# Altium PCB {TEX137}_F2837x_controlCARD_R1.3_PCB_PADS.PcbDoc (part 6 of 6)
Units mil, origin at the board's own origin, x right, y up, seen from the top; angles counter-clockwise.
Board outline 4163.98 x 2011.3 mil, 10 copper layers (Primary Side, Inner Layer 2, Inner Layer 3, Inner Layer 4, Inner Layer 5, Inner Layer 6, Inner Layer 7, Inner Layer 8, Inner Layer 9, Secondary Side), stack 103.5 mil thick; 292 components, 317 nets, 1400 pads, 1032 vias.
Unrouted connection lines stored in the file: 106.
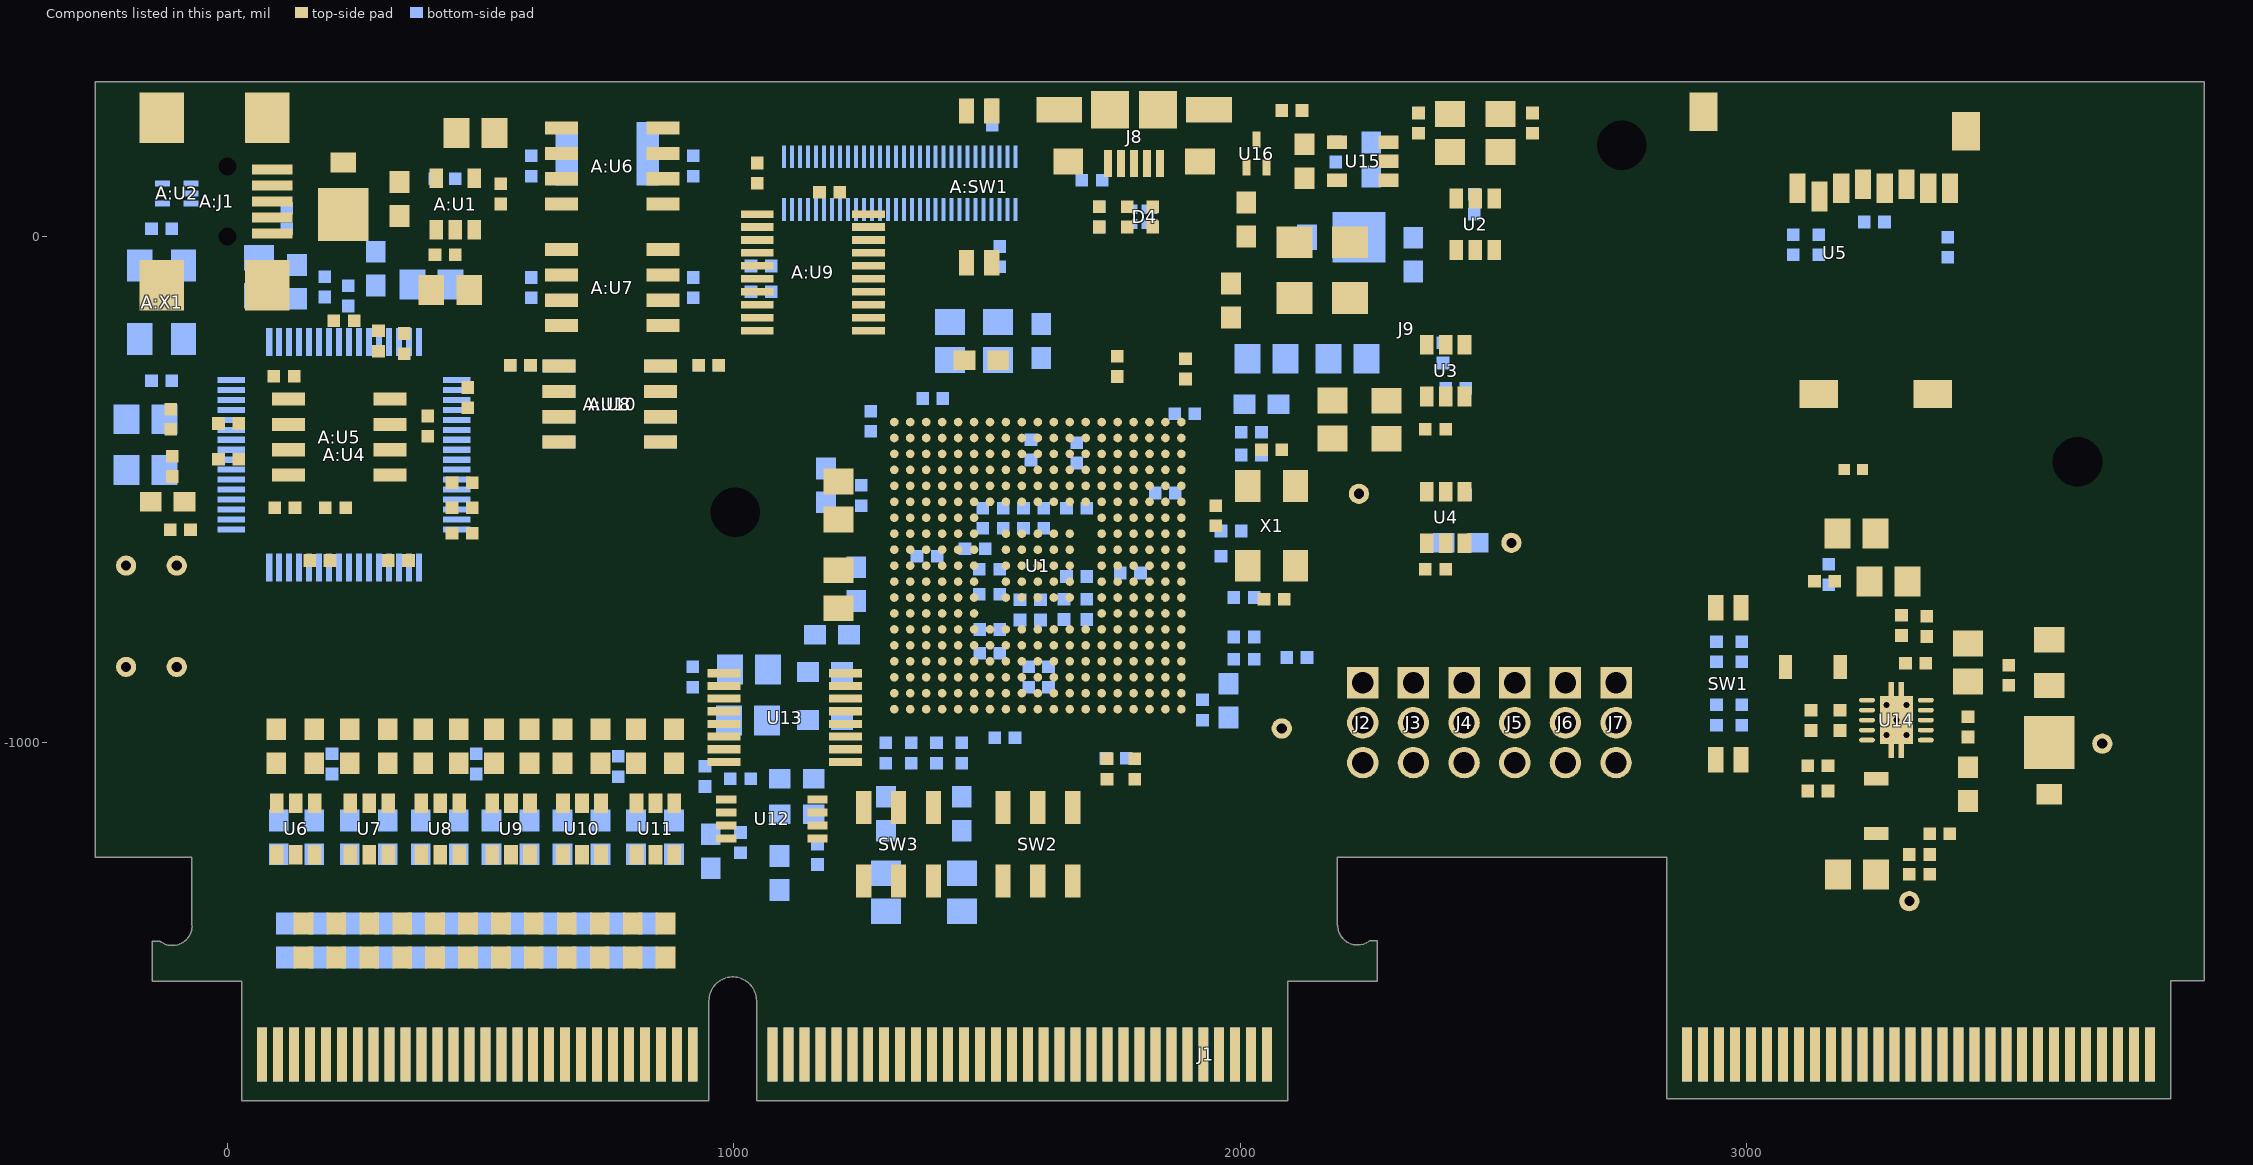
[diagram p14: the components of this part, seen from the top]

## Keep-outs
Keep-Out Layer:
  lines w10: -132.44,-1392.1 -148.44,-1392.1 -148.44,-1470.1 28.56,-1470.1 28.56,-1706.1 950.67,-1706.1 950.67,-1509.1 cw(c997.67,-1509.1) 1044.67,-1509.1 1044.67,-1706.1 2093.56,-1706.1 2093.56,-1470.1 2270.56,-1470.1 2270.56,-1391.1 2254.56,-1391.1 ; -132.42,-1392.12 ccw(c-108.89,-1361.01) -69.94,-1359.11 -70.44,-1359.1 -70.44,-1226.1 -261.41,-1226.1 -261.42,305.19 3902.56,305.2 3902.56,-1470 3837.15,-1470 3837.15,-1702.1 2841.87,-1702.1 2841.87,-1226.1 2191.56,-1226.1 2191.56,-1262.51 ; 2254.59,-1391.08 cw(c2231.06,-1359.98) 2192.06,-1360.11 2191.56,-1360.1 2191.56,-1262.51 ; 2191.56,-1262.51 2191.56,-1262.51

## Other copper
Primary Side:
  region net VDD_3V3: 3085,-855 3045,-855 3045,-509.2 3190,-509.2 3190,-615 3145,-615 3145,-805 3085,-805 3085,-855
  region net USB_5V0: 3625,-785 3565,-785 3565,-670 3625,-670 3625,-785
  region net HSEC_5V0: 3545,-1085 3670,-1085 3670,-1180 3545,-1180 3545,-1085
  region net VDD_MCU_3V3: 1521,-238.02 1630.5,-238.02 1630.5,-287.02 1521,-287.02 1521,-238.02
  region net EMU_5V0: 245,95 305,95 305,10 245,10 245,95
  region net $$$4984: 3245,-915 3215,-915 3215,-880 3165,-880 3165,-825 3245,-825 3245,-915
  region net $$$6167: 3226.9,-991.5 3251.1,-991.5 3251.1,-1075.9 3226.9,-1075.9 3226.9,-991.5
  text "1" at 5106.07,-6247.49 h75
  text "Primary Side" at 6491.14,-6261.77 h75
Inner Layer 3:
  text "8" at 5090.01,-6247.49 h75
  text "Internal Signal 4" at 6409.19,-6261.77 h75
Inner Layer 4:
  text "4" at 5088.22,-6247.49 h75
  text "Internal Signal 2" at 6410.98,-6261.77 h75
Inner Layer 7:
  text "7" at 5090.01,-6247.49 h75
  text "Internal Signal 3" at 6410.98,-6261.77 h75
Inner Layer 8:
  text "3" at 5090.01,-6247.49 h75
  text "Internal Signal 1" at 6427.05,-6261.77 h75
Secondary Side:
  region net HSEC_5V0: 3670,-1085 3615,-1085 3615,-1180 3670,-1180 3670,-1085
  region net USB_5V0: 3620,-775 3570,-775 3570,-675 3620,-675 3620,-775
  region net VDD_3V3: 1417,-141.54 1366.5,-141.54 1366.5,-196.9 1417,-196.9 1417,-141.54
  region net VDD_MCU_3V3: 1521,-234.02 1630.9,-234.02 1630.9,-287.02 1521,-287.02 1521,-234.02
  text "TEX137" at -222.49,-1158.52 h30 r270
  text "F2837x controlCARD R1.3" at 3811,-1218.9 h30 r270
  text "Pb" at 3805,-1355.77 h25 r270
  text "10" at 5062.51,-6247.49 h75
  text "Secondary Side" at 6422.41,-6261.77 h75
Inner Layer 2 (plane layer: these items are gaps in the copper):
  region: 700,318.9 800,318.9 800,-781 781,-800 -275.5,-800 -275.5,-700 675,-700 700,-675 700,318.9
  lines w10: 721.85,-752.63 744.35,-775.13 ; 745,-775 1475,-775 1475,-900 1505,-900 1505,-935 1475,-935 1475,-1407.48 1425,-1407.48
  lines w50: -132.44,-1392.1 -148.44,-1392.1 -148.44,-1470.1 28.56,-1470.1 28.56,-1706.1 950.67,-1706.1 950.67,-1509.1 cw(c997.67,-1509.1) 1044.67,-1509.1 1044.67,-1706.1 2093.56,-1706.1 2093.56,-1470.1 2270.56,-1470.1 2270.56,-1391.1 2254.56,-1391.1 ; -132.42,-1392.12 ccw(c-108.89,-1361.01) -69.94,-1359.11 -70.44,-1359.1 -70.44,-1226.1 -263.94,-1226.1 -263.93,305.19 3902.56,305.19 3902.56,-1470 3837.15,-1470 3837.15,-1702.1 2841.87,-1702.1 2841.87,-1226.1 2191.56,-1226.1 2191.56,-1360.1 2192.06,-1360.1 ccw(c2231.06,-1359.98) 2254.59,-1391.08
  text "2" at 5090.01,-6247.49 h75
  text "Internal Plane 1" at 6442.76,-6247.49 h75
Inner Layer 5 (plane layer: these items are gaps in the copper):
  region: 57 vertices and 4 holes, not listed, extent -261.42,-1706.1 3902.56,305.2
  region: 2120,-1060 2195,-1060 2195,-1185 2120,-1185 2120,-1060
  lines w10: 925,-1506.48 925,-1615 90,-1615 90,-1435 -35,-1435 -35,-1195 -239,-1195 -239,-800 779,-800 779,-780 1470,-780 1470,-905 1500,-905 1500,-930 1470,-930 1470,-1402.48 1420,-1402.48 1420,-1412.48 1480,-1412.48 1480,-940 1510,-940 1510,-895 1480,-895 1480,-770 800,-770 800,279.52 3876,279.52 3876,-1443.48 3811,-1443.48 3811,-1630 2880,-1630 2880,-1185 2180,-1185 2180,-575 3240,-575 3240,-1365 3495,-1365 3495,-280 2145,-280 2145,-355 1995,-355 1995,-440 1390,-440 1390,-700 1545,-700 1545,-1060 2145,-1060 2145,-1436 2045,-1436 2045,-1610 1070,-1610 1070,-1506.48 ; 925,-1506.47 cw(c997.5,-1509.76) 1070,-1506.47 ; -238,-700 679,-700 699,-680 699,279.52 -238,279.52 -238,-700 ; 1405,-690 1405,-455 2020,-455 2020,-370 2296.95,-370 2296.95,-550.84 2145,-550.84 2145,-1040 1560,-1040 1560,-690 1405,-690 ; 2155,-356.84 2155,-300 3480,-300 3480,-1350 3255,-1350 3255,-555 2308.95,-555 2308.95,-356.84 2155,-356.84
  text "6" at 5091.79,-6247.49 h75
  text "Internal Plane 3" at 6426.69,-6247.49 h75
Inner Layer 6 (plane layer: these items are gaps in the copper):
  region: 700,318.9 800,318.9 800,-779.48 779.48,-800 -275.5,-800 -275.5,-700 675,-700 700,-675 700,318.9
  lines w10: 890,-867 89,-867 89,-891 -264.49,-891 -264.49,-1227.52 -64.49,-1227.52 -64.49,-1332.52 1645,-1332.52 1645,-1000 1474.8,-1000 1474.8,-935.58 1505.7,-935.58 1505.7,-899.78 1475.2,-899.78 1475.2,-774.68 1290,-774.68 1290,-754 ; 890,-867 890,-775 ; 890,-867 890,-775 ; 890,-867 90,-867 90,-891 -275,-891 -275,-758 727,-758 727,303 3893,303 3893,-915 2912,-915 2912,-705 2137,-705 2137,-1091 1645,-1091 1645,-1002 1591,-1002 1591,-763 1709,-763 1709,-949 1926,-949 1926,-652 2006,-652 2006,-252 1154,-252 1154,-460 ; 890,-775 1133,-775 ; 890,-775 1133,-775 ; 1133,-775 1133,-754 1290,-754 ; 1133,-775 1133,-755 1197,-755 1197,-460 1154,-460 ; 1154,-460 1154,-252.52 1895.51,-252.52 ; 1154,-460 1196,-460 1196,-754 1290,-754 ; 1290,-754 1290,-774.18 1475.7,-774.18 1475.7,-899.28 1505.8,-899.28 1505.8,-936.28 1475,-936.28 1475,-1000 1589.51,-1000 1589.51,-762.52 1709.51,-762.52 1709.51,-948.52 1925.51,-948.52 1925.51,-666.52 1655.51,-666.52 1655.51,-537.52 ; 1655.51,-537.52 1895.51,-537.52 ; 1655.51,-537.52 1655.51,-667.52 1925.51,-667.52 1925.51,-652.52 2005.51,-652.52 2005.51,-252.52 1895.51,-252.52 ; 1655.51,-537.52 1895.51,-537.52 ; 1895.51,-537.52 1895.51,-252.52 ; 1895.51,-537.52 1895.51,-252.52
  lines w50: -132.44,-1392.1 -148.44,-1392.1 -148.44,-1470.1 28.56,-1470.1 28.56,-1706.1 950.67,-1706.1 950.67,-1509.1 cw(c997.67,-1509.1) 1044.67,-1509.1 1044.67,-1706.1 2093.56,-1706.1 2093.56,-1470.1 2270.56,-1470.1 2270.56,-1391.1 2254.56,-1391.1 ; -132.42,-1392.12 ccw(c-108.89,-1361.01) -69.94,-1359.11 -70.44,-1359.1 -70.44,-1226.1 -263.94,-1226.1 -263.93,305.19 3902.56,305.19 3902.56,-1470 3837.15,-1470 3837.15,-1702.1 2841.87,-1702.1 2841.87,-1226.1 2191.56,-1226.1 2191.56,-1360.1 2192.06,-1360.1 ccw(c2231.06,-1359.98) 2254.59,-1391.08
  text "5" at 5090.01,-6247.49 h75
  text "Internal Plane 2" at 6426.69,-6247.49 h75
Inner Layer 9 (plane layer: these items are gaps in the copper):
  region: 700,318.9 800,318.9 800,-779.48 779.48,-800 -275.5,-800 -275.5,-700 675,-700 700,-675 700,318.9
  lines w10: 1545.51,-27.52 1545.51,297.48 3900.51,297.48 3900.51,-837.52 3540.51,-837.52 3540.51,-42.52 2451.95,-42.52 2451.95,-120.84 2045.51,-120.84 2045.51,-27.52 1545.51,-27.52
  lines w25: -132.44,-1392.1 -148.44,-1392.1 -148.44,-1470.1 28.56,-1470.1 28.56,-1706.1 950.67,-1706.1 950.67,-1509.1 cw(c997.67,-1509.1) 1044.67,-1509.1 1044.67,-1706.1 2093.56,-1706.1 2093.56,-1470.1 2270.56,-1470.1 2270.56,-1391.1 2254.56,-1391.1 ; -132.42,-1392.12 ccw(c-108.89,-1361.01) -69.94,-1359.11 -70.44,-1359.1 -70.44,-1226.1 -263.94,-1226.1 -263.93,305.19 3902.56,305.19 3902.56,-1470 3837.15,-1470 3837.15,-1702.1 2841.87,-1702.1 2841.87,-1226.1 2191.56,-1226.1 2191.56,-1360.1 2192.06,-1360.1 ccw(c2231.06,-1359.98) 2254.59,-1391.08
  lines w50: -132.44,-1392.1 -148.44,-1392.1 -148.44,-1470.1 28.56,-1470.1 28.56,-1706.1 950.67,-1706.1 950.67,-1509.1 cw(c997.67,-1509.1) 1044.67,-1509.1 1044.67,-1706.1 2093.56,-1706.1 2093.56,-1470.1 2270.56,-1470.1 2270.56,-1391.1 2254.56,-1391.1 ; -132.42,-1392.12 ccw(c-108.89,-1361.01) -69.94,-1359.11 -70.44,-1359.1 -70.44,-1226.1 -263.94,-1226.1 -263.93,305.19 3902.56,305.19 3902.56,-1470 3837.15,-1470 3837.15,-1702.1 2841.87,-1702.1 2841.87,-1226.1 2191.56,-1226.1 2191.56,-1360.1 2192.06,-1360.1 ccw(c2231.06,-1359.98) 2254.59,-1391.08
  text "9" at 5091.79,-6247.49 h75
  text "Internal Plane 4" at 6424.91,-6247.49 h75

## Silkscreen, mask and mechanical layers (free items; w line width, h text height)
Primary Silkscreen:
  circle w6: c1269.25,242 r8.25
  lines w6: 1178.5,206 1213,206 1213,257.5 1247,257.5 1247,234.5 1250,232 1251,230 1255.5,228 1257.5,227 1253.5,212 1241,212 1238,203 1252,203 1246.5,180 1246.5,178.5 1248.5,176.5 1252,174.5 1256,173 1259,173 1261.5,173.5 1265.5,175 1265.5,175.5 1267,177 1267,179 1267,180 1266.5,181 1265.5,182 1264.5,182.5 1269,203 1282,203 1284,211.5 1270.5,211.5 1274,226 1276.5,226.5 1277.5,227 1281,227 1283,227 1285.5,228 1291,228 1291.5,227 1293,227 1296.5,226.5 1298.5,226 1300.5,223.5 1301.5,221 1300.5,221 1301.5,219 1302,215 1302.5,210.5 1302.5,206 1303.5,204 1305.5,202.5 1307.5,199 1309.5,195 1309.5,191.5 1310.5,186.5 1310.5,183 1309,177.5 1307.5,175.5 1301.5,173 1294.5,170 1288.5,168 1283.5,166 1278,163.5 1274,161.5 1269,158.5 1267,154.5 1265,148 1265.5,143.5 1266.5,140.5 1267.5,138.5 1266.5,136 1265,134.5 1260,135 1253.5,138.5 1245,142.5 1240.5,148 1238,151.5 1235.5,158 1235.5,160.5 1230,169 1226,174.5 1223,177.5 1221,178.5 1216,175 1213.5,173 1208,173 1201,177 1195.5,185.5 1191,191.5 1182.5,198.5 ; 1254,183 1257.5,183 1267,226.5 1264,226.5 ; 1254.12,182.91 1263.62,226.41
  lines w8: 1178.5,206 1180,202.5 1182.5,198.5
  text "Texas" at 988,256 h20
  text "ON" at 1360,232 h25
  text "1" at 1650,225 h30
  text "Instruments" at 992,220 h20
  text "ISO" at 1610,155 h25 r90
  text "ISO" at 1383.88,147.64 h25 r90
  text "JTAG" at 1383.88,-2.36 h25 r90
  text "UART" at 1610,-5 h25 r90
  text "OFF" at 1348.56,-76.1 h25
  text "F2837x controlCARD R1.3" at 3844,-416 h30 r90
  text "1" at 2881,-755.48 h30
  text "1" at 2150,-900 h25
  text "2" at 2150,-975 h25
  text "0" at 2880,-1050 h30
  text "3" at 2150,-1055 h25
  text "D" at 1448,-1143.99 h30
  text "B" at 1724,-1143.99 h30
  text "A" at 1724,-1239.99 h30
  text "C" at 1444,-1241.12 h30
  text "Primary Side Silkscreen" at 6219.95,-6261.77 h75
Secondary Silkscreen:
  region: 3849,262 3599,262 3599,-238 3849,-238 3849,262
  text "For evaluation only;" at 3575.5,168 h30
  text "not FCC approved for resale" at 3575.5,97.02 h30
  text "Secondary Side Silkscreen" at 6151.21,-6261.77 h75
Drill Drawing:
  drawing of 862 lines, arcs and shapes, not listed
  text "FABRICATION NOTES:" at -6683.83,1128.9 h56.25
  text "1. NUMBER OF LAYERS = 10" at -6683.83,903.9 h56.25
  text "2. UNLESS OTHERWISE SPECIFIED THE PRINTED WIRING BOARD" at -6702.58,772.65 h56.25
  text "-264mils" at -220,655 h75 r90
  text "0" at 45,645 h75 r90
  text "SHALL MEET THE REQUIREMENTS OF IPC-6012 CLASS 2." at -6552.58,622.65 h56.25
  text "3. ACCEPTABILIITY TO IPC-A-600 CLASS 2." at -6703.83,458.9 h56.25
  text "4. MATERIAL:" at -6702.58,303.9 h56.25
  text "305mils" at -1140,260 h75
  text "A. TYPE: FR4 OR EQUIVALENT" at -6458.83,153.9 h56.25
  text "0" at -695,40 h75 r180
  text "B. RAW Cu WEIGHT OUTER LAYERS:       .5 Oz." at -6458.83,3.9 h56.25
  text "C. RAW Cu WEIGHT INNER SIGNAL LAYERS: .5 Oz." at -6452.83,-136.1 h56.25
  text "D. RAW Cu WEIGHT INNER PLANE LAYERS:  .5 Oz." at -6458.83,-296.1 h56.25
  text "E.     HI Tg      RoHS       HALOGEN FREE" at -6458.83,-446.1 h56.25
  text "5. PROCESSING:" at -6683.83,-596.1 h56.25
  text "A. COPPER THEIVING ALLOWED ON OUTER LAYERS KEEPING A MINIMUM OF 0.200'" at -6458.83,-746.1 h56.25
  text "B. REMOVE ALL UNUSED PADS ON ARTWORK ON ALL INNER LAYERS." at -6458.83,-896.1 h56.25
  text "C. ETCH DATE CODE AND UL RECOGNIZED VENDOR MARK ON SECONDARY SIDE." at -6458.83,-1046.1 h56.25
  text "6. IMPEDANCE:" at -6683.83,-1196.1 h56.25
  text "2PL R39mil" at -1285,-1210 h75
  text "A. *USE REQUIRMENTS IN STACKUP. FABRICATOR HAS PERMISSION TO CHANGE THICKNESS" at -6458.83,-1346.1 h56.25
  text "AND TRACE WIDTHS IN ORDER TO MEET IMPEDANCE REQUIRMENTS." at -6308.83,-1496.1 h56.25
  text "B. NON-CONTROLLED TRACES TO BE WITHIN 20% OF SPECIFIED APERTURE" at -6458.83,-1646.1 h56.25
  text "-1706mils" at -1310,-1760 h75
  text "VALUE IN ARTWORK." at -6308.83,-1796.1 h56.25
  text "7. Cu PLATING:" at -6683.83,-1946.1 h56.25
  text "VIEW A-A" at -1328,-2055 h75
  text "A. UNLESS OTHERWISE SPECIFIED, HOLE DIMENSIONS ARE FOR FINISHED HOLES." at -6458.83,-2096.1 h56.25
  text "B. UNLESS OTHERWISE SPECIFIED, HOLE BARREL THICKNESS TO BE 0.001\" MIN." at -6458.83,-2246.1 h56.25
  text "8. FINISH PLATING:" at -6683.83,-2396.1 h56.25
  text "FINISH ALL EXPOSED PADS WITH:" at -5708.83,-2396.1 h56.25
  text "STACKUP IMPEDANCE PER DOC -  10L WILLOW SPRINGS TI-50_90_100 06172013.pdf" at -295,-2450 h30
  text "ELECTROLESS NICKEL/IMMERSION GOLD (ENIG), FOR COMPONENT AREA" at -6083.83,-2546.1 h56.25
  text "A." at -6394,-2548.18 h56.25
  text "Layer 1 - Primary Side" at 1872.5,-2638.64 h37.5
  text "1/2 Oz. Raw, 1 1/2 Oz. Finished" at 502.38,-2642.97 h25
  text "IMMERSION SILVER (IMM AG)" at -6083.83,-2696.1 h56.25
  text "IMPEDANCE - 5.3 - 50SE, 5/6 - 90DIF, 4.5/6.5 - 100DIF" at 2235,-2735 h30
  text "Er = 4.3 - THICKNESS = FABRICATOR MAY DETERMINE" at 180.19,-2790.87 h31.25
  text "TIN/LEAD (HASL)" at -6083.83,-2846.1 h56.25
  text "1/2 Oz. Cu" at 688.89,-2941.78 h25
  text "Layer 2 - Internal Plane" at 1872.5,-2950.24 h37.5
  text "HARD GOLD OVER NICKEL  30u/80u, ON EDGEFINGERS" at -6083.83,-2996.1 h56.25
  text "B." at -6373,-3001.98 h56.25
  text "Er = 4.3 - THICKNESS = FABRICATOR MAY DETERMINE" at 180.19,-3090.87 h31.25
  text "WHITE TIN" at -6083.83,-3146.1 h56.25
  text "Layer 3 - Internal Signal" at 1872.5,-3238.64 h37.5
  text "1/2 Oz. Cu" at 688.89,-3241.78 h25
  text "ORGANIC SOLDERABILITY PRESERVATIVE (OSP)" at -6083.83,-3296.1 h56.25
  text "IMPEDANCE - 5.5 - 50SE, 5.6/5.4 - 90DIF, 4.3/4.7 - 100DIF" at 2285,-3320 h30
  text "Er = 4.3 - THICKNESS = FABRICATOR MAY DETERMINE" at 180.19,-3390.87 h31.25
  text "LEAD FREE HASL" at -6083.83,-3446.1 h56.25
  text "1/2 Oz. Cu" at 688.89,-3541.78 h25
  text "Layer 4 - Internal Signal" at 1872.5,-3551.14 h37.5
  text "9. SOLDERMASK:" at -6683.83,-3596.1 h56.25
  text "IMPEDANCE - 5.5 - 50SE, 4.3/4.7 - 100DIF" at 2280,-3645 h30
  text "30" at 6348.17,-3660.48 h50
  text "Er = 4.3 - THICKNESS = FABRICATOR MAY DETERMINE" at 180.19,-3690.87 h31.25
  text "A. LPI GREEN SOLDER MASK OVER BARE COPPER BOTH SIDES." at -6458.83,-3746.1 h56.25
  text "Layer 5 - Internal Plane" at 1872.5,-3837.74 h37.5
  text "1/2 Oz. Cu" at 688.89,-3841.78 h25
  text "B. SOLDER MASK REGISTRATION TO BE WITHIN +/-.003\" OF RELEVANT LAYER." at -6458.83,-3896.1 h56.25
  text "Er = 4.3 - THICKNESS = FABRICATOR MAY DETERMINE" at 180.19,-3990.87 h31.25
  text "0.062\" +/- 0.006\"" at -914.48,-3996.67 h37.5
  text "C. NO MASK TO APPEAR ON PADS" at -6458.83,-4046.1 h56.25
  text "1/2 Oz. Cu" at 688.89,-4141.78 h25
  text "Layer 6 - Internal Plane" at 1872.5,-4150.24 h37.5
  text "10. SILKSCREEN:" at -6683.83,-4196.1 h56.25
  text "Er = 4.3 - THICKNESS = FABRICATOR MAY DETERMINE" at 180.19,-4290.87 h31.25
  text "A. USE WHITE NON-CONDUCTIVE INK." at -6458.83,-4346.1 h56.25
  text "IMPEDANCE - 5.5 - 50SE, 5.6/5.4 - 90DIF" at 2300,-4360 h30
  text "Layer 7 - Internal Signal" at 1872.5,-4438.64 h37.5
  text "1/2 Oz. Cu" at 688.89,-4441.78 h25
  text "B. NO SILKSCREEN TO APPEAR ON PADS." at -6458.83,-4496.1 h56.25
  text "Er = 4.3 - THICKNESS = FABRICATOR MAY DETERMINE" at 180.19,-4590.87 h31.25
  text "11. WARP AND TWIST NOT TO EXCEED .010 INCH/INCH." at -6683.83,-4646.1 h56.25
  text "IMPEDANCE - 5.5 - 50SE, 5.6/5.4 - 90DIF, 4.3/4.7 - 100DIF" at 2310,-4675 h30
  text "0.015\"" at 6328,-4708 h50
  text "1/2 Oz. Cu" at 688.89,-4741.78 h25
  text "Layer 8 - Internal Signal" at 1872.5,-4751.14 h37.5
  text "12. MILLING:" at -6683.83,-4796.1 h56.25
  text "Er = 4.3 - THICKNESS = FABRICATOR MAY DETERMINE" at 180.19,-4890.87 h31.25
  text "A. ALL BOARD DIMENSIONS TO BE HELD TO WITHIN 0.005\"." at -6458.83,-4946.1 h56.25
  text "VIEW A-A" at 5743,-4958 h75
  text "Layer 9 - Internal Plane" at 1872.5,-5037.74 h37.5
  text "1/2 Oz. Cu" at 688.89,-5041.78 h25
  text "B. IF NO DIMENSIONS PRESENT, USE BOARD OUTLINE IN DD.PHO (THIS DRAWING)" at -6458.83,-5096.1 h56.25
  text "ROTATED 90 DEG." at 5693,-5108 h50
  text "Er = 4.3 - THICKNESS = FABRICATOR MAY DETERMINE" at 180.19,-5190.87 h31.25
  text "TO FEED DIRECTLY INTO MILLING PROCESSOR." at -6308.83,-5246.1 h56.25
  text "IMPEDANCE - 5.3 - 50SE, 5/6 - 90DIF, 4.5/6.5 - 100DIF" at 2310,-5255 h30
  text "1/2 Oz. Raw Cu, 1 1/2 Oz. Finished" at 470.31,-5342.97 h25
  text "Layer 10 - Secondary Side" at 1872.5,-5351.14 h37.5
  text "C. PALLETIZE 2UP" at -6453,-5413 h56.25
Primary Assembly Drawing:
  lines w1: -2416.06,-2434.46 -2294.75,-2434.46 ; -2416.06,-1148.55 -2294.75,-1148.55 ; -2416.06,-8.21 -2294.75,-8.21 ; -2367.93,-1209.84 -2302.77,-1148.49 -2367.93,-1088.42 ; -1324.25,-3817.43 -1324.25,-3696.11 ; -1324.25,1399.01 -1324.25,1520.32 ; -353.75,-3817.43 -353.75,-3696.11 ; -353.75,1399.01 -353.75,1520.32 ; 677.41,-3817.43 677.41,-3696.11 ; 677.41,1399.01 677.41,1520.32 ; 959.24,-3694.59 959.24,-2723.12 ; 959.88,-3283.59 1893.99,-3283.59 ; 959.88,-3208.86 1893.99,-3208.86 ; 959.88,-3134.13 1893.99,-3134.13 ; 959.88,-3059.4 1893.99,-3059.4 ; 959.88,-2984.67 1893.99,-2984.67 ; 959.88,-2909.94 1893.99,-2909.94 ; 959.88,-2816.53 1893.99,-2816.53 ; 959.88,-2723.12 5705.14,-2723.12 ; 1426.93,-3283.59 1426.93,-2816.53 ; 1646.06,1471.22 1708.55,1398.92 1771.34,1471.22 ; 1708.57,-3817.43 1708.57,-3696.11 ; 1708.57,1399.01 1708.57,1520.32 ; 1893.99,-3694.59 1893.99,-2723.12 ; 1893.99,-2898.38 2846.77,-2898.38 ; 2739.72,-3817.43 2739.72,-3696.11 ; 2739.72,1399.01 2739.72,1520.32 ; 2846.77,-3694.59 2846.77,-2723.12 ; 2846.77,-3619.86 3780.88,-3619.86 ; 2846.77,-3545.13 3780.88,-3545.13 ; 2846.77,-3470.41 3780.88,-3470.41 ; 2846.77,-3395.68 3780.88,-3395.68 5705.14,-3395.68 ; 2846.77,-3320.95 3780.88,-3320.95 ; 2846.77,-3246.22 3780.88,-3246.22 ; 2846.77,-3171.49 3780.88,-3171.49 ; 2846.77,-3096.76 3780.88,-3096.76 ; 2846.77,-3022.04 3780.88,-3022.04 ; 2846.77,-2947.31 3780.88,-2947.31 ; 2846.77,-2872.58 3780.88,-2872.58 ; 2846.77,-2797.85 3780.88,-2797.85 ; 3520.73,-3694.59 3520.73,-2723.12 ; 3770.88,-3817.43 3770.88,-3696.11 ; 3770.88,1399.01 3770.88,1520.32 ; 3780.88,-2965.99 5705.14,-2965.99 ; 3781.92,-3581.51 5700.92,-3581.51 ; 3782.28,-3694.59 3782.28,-2723.12 ; 3930.34,-3582.5 3930.34,-3395.68 ; 4013.5,1035.07 5711.88,1035.07 ; 4013.5,1107.86 5711.88,1107.86 ; 4013.5,1180.65 5711.88,1180.65 ; 4013.5,1253.44 5711.88,1253.44 ; 4013.5,1326.22 5711.88,1326.22 ; 4013.5,1399.01 4013.5,962.29 5711.88,962.29 ; 4110.55,962.29 4110.55,1326.22 ; 4154.52,-3694.59 4154.52,-3582.5 ; 4207.6,962.29 4207.6,1326.22 ; 4416.07,-3582.5 4416.07,-3395.68 ; 4741.38,-3817.43 4741.38,-3696.11 ; 4741.38,1399.01 4741.38,1520.32 ; 5051.26,-3694.59 5051.26,-3582.5 ; 5275.15,962.29 5275.15,1326.22 ; 5469.25,962.29 5469.25,1326.22 ; 5537,-3582.5 5537,-3395.68 ; 5711.88,-2434.46 5833.19,-2434.46 ; 5711.88,-1148.55 5833.19,-1148.55 ; 5711.88,-8.21 5833.19,-8.21 ; 5783.85,-1209.2 5701.8,-1149.13 5783.85,-1088.85 ; 5784.67,-1209.21 5784.67,-1087.89 ; 1708.57,-3696.11 1769.22,-3768.9 1647.91,-3768.9 1708.57,-3696.11 ; -2416.06,-3817.43 -2416.06,1520.32 5833.19,1520.32 5833.19,-3817.43 -2416.06,-3817.43 ; -2302.34,-3696.11 -2302.34,1399.01 5704.29,1399.01 5704.29,-3696.11 -2302.34,-3696.11
  text "2" at 4205.47,1425.7 h51.99
  text "8" at -1860.15,1423.27 h51.99
  text "7" at -829,1423.27 h51.99
  text "6" at 141.5,1423.27 h51.99
  text "5" at 1172.66,1423.27 h51.99
  text "4" at 2143.16,1423.27 h51.99
  text "3" at 3234.97,1423.27 h51.99
  text "1" at 5236.63,1423.27 h51.99
  text "REVISIONS" at 4727.12,1350.49 h21.66
  text "REV." at 4050.19,1277.7 h13.86
  text "REV." at 4132.69,1277.7 h13.86
  text "DESCRIPTION" at 4617.94,1277.7 h13.86
  text "DATE" at 5333.68,1277.7 h13.86
  text "APPROVED" at 5515.65,1277.7 h13.86
  text "Notes:" at -2121.02,1181.51 h75
  text "1) Refer to BOM for stuffing options." at -2053.52,1057.76 h46.88
  text "2) Observe polarity on diodes and capacitors." at -2072.27,941.51 h46.88
  text "D" at -2369.66,622.61 h51.99
  text "D" at 5758.27,622.61 h51.99
  text "C" at -2369.66,-590.51 h51.99
  text "C" at 5758.27,-590.51 h51.99
  text "B" at -2369.66,-1803.64 h51.99
  text "B" at 5758.27,-1803.64 h51.99
  text "Primary Side" at 1139.41,-2189.99 h133.44
  text "DWN:" at 2877.37,-2773.48 h21.35
  text "APPLICATION" at 1287.42,-2776.5 h21.35
  text "CONTRACT NO." at 1941.29,-2776.5 h21.35
  text "www.wstscorp.com    10/15" at 3086.19,-2779.99 h26.69
  text "CHK:" at 2877.37,-2848.21 h21.35
  text "TEXAS INSTRUMENTS" at 4240.9,-2866.59 h66.72
  text "USED ON" at 1093.23,-2876.24 h21.35
  text "NEXT ASSY." at 1522.92,-2876.24 h21.35
  text "P.E.:" at 2877.37,-2922.94 h21.35
  text "UNLESS OTHERWISE SPECIFIED" at 1943.27,-2960.31 h26.69
  text "DES.ENG.:" at 2877.37,-2997.67 h21.35
  text "TITLE:" at 3828.24,-3022.04 h21.35
  text "1. TOLERANCES:" at 1943.27,-3063.06 h21.35
  text "P.C.:" at 2877.37,-3072.4 h21.35
  text "ASSEMBLY DRAWING," at 4363.83,-3080.63 h53.38
  text "A" at -2369.66,-3089.55 h51.99
  text "A" at 5758.27,-3089.55 h51.99
  text "+" at 2279.54,-3100.42 h10.68
  text "0.26 (.010)" at 2335.59,-3119.1 h21.35
  text "-" at 2279.54,-3124.62 h10.68
  text "LINEAR =" at 2008.65,-3128.44 h21.35
  text "Q.C.:" at 2877.37,-3147.13 h21.35
  text "0" at 2457.03,-3156.47 h10.68
  text "+" at 2307.57,-3165.81 h10.68
  text "ANGULAR =" at 2008.65,-3184.49 h21.35
  text "0.50" at 2363.61,-3184.49 h21.35
  text "-" at 2307.57,-3190.01 h10.68
  text "C.M.:" at 2877.37,-3231.2 h21.35
  text "F2837x controlCARD" at 4441.53,-3237.63 h40.03
  text "2. ALL DIMENSIONS ARE IN" at 1943.27,-3296.58 h21.35
  text "REL:" at 2877.37,-3296.58 h21.35
  text "MATERIAL:  SEE NOTE" at 1009.16,-3352.63 h21.35
  text "MM (INCHES)." at 2008.65,-3352.63 h21.35
  text "MFG:" at 2877.37,-3371.31 h21.35
  text "FINISH:  SEE NOTE" at 1009.16,-3418.02 h21.35
  text "SIZE" at 3809.56,-3442.38 h21.35
  text "CAGE CODE NO." at 3987.04,-3442.38 h21.35
  text "DRAWING NO." at 4463.44,-3442.38 h21.35
  text "REV:" at 5575.03,-3442.38 h21.35
  text "ENG.MGR:" at 2877.37,-3446.04 h21.35
  text "3. INTERPRET DRAWING IN" at 1943.27,-3492.75 h21.35
  text "OTHER:" at 2877.37,-3520.77 h21.35
  text "F2837x controlCARD" at 4567.24,-3520.68 h45
  text "1.3" at 5578.19,-3535.99 h45
  text "C" at 3845.47,-3546.18 h53.38
  text "ACCORDANCE WITH" at 2008.65,-3548.79 h21.35
  text "OTHER:" at 2877.37,-3595.5 h21.35
  text "DOD-STD-100." at 2008.65,-3604.84 h21.35
  text "SCALE:" at 3818.41,-3652.01 h21.35
  text "SHEET     OF" at 5092.43,-3652.01 h21.35
  text "DO NOT SCALE DRAWING" at 1109.56,-3653.05 h21.35
  text "1:1" at 4024.94,-3654.46 h26.69
  text "1    2" at 5261.94,-3658.05 h26.69
  text "OTHER:" at 2877.37,-3670.23 h21.35
  text "2" at 4205.47,-3790.74 h51.99
  text "8" at -1860.15,-3793.16 h51.99
  text "7" at -829,-3793.16 h51.99
  text "6" at 141.5,-3793.16 h51.99
  text "5" at 1172.66,-3793.16 h51.99
  text "4" at 2143.16,-3793.16 h51.99
  text "3" at 3234.97,-3793.16 h51.99
  text "1" at 5236.63,-3793.16 h51.99
Secondary Assembly Drawing:
  circle w1: c1100.5,52.02 r6.36
  lines w1: -2348.19,-2373.96 -2226.88,-2373.96 ; -2348.19,-1088.05 -2226.88,-1088.05 ; -2348.19,52.29 -2226.88,52.29 ; -2299.67,-1148.71 -2299.67,-1027.39 ; -2298.85,-1148.7 -2216.8,-1088.63 -2298.85,-1028.35 ; -2226.88,1022.79 -528.5,1022.79 -528.5,1459.51 ; -2226.88,1095.57 -528.5,1095.57 ; -2226.88,1168.36 -528.5,1168.36 ; -2226.88,1241.15 -528.5,1241.15 ; -2226.88,1313.94 -528.5,1313.94 ; -2226.88,1386.72 -528.5,1386.72 ; -2220.14,-3335.18 -295.88,-3335.18 638.23,-3335.18 ; -2220.14,-2905.49 -295.88,-2905.49 ; -2220.14,-2662.62 2525.12,-2662.62 ; -2215.92,-3521.01 -296.92,-3521.01 ; -2052,-3522 -2052,-3335.18 ; -1984.25,1022.79 -1984.25,1386.72 ; -1790.15,1022.79 -1790.15,1386.72 ; -1566.26,-3634.09 -1566.26,-3522 ; -1256.38,-3756.93 -1256.38,-3635.61 ; -1256.38,1459.51 -1256.38,1580.82 ; -931.07,-3522 -931.07,-3335.18 ; -722.6,1022.79 -722.6,1386.72 ; -669.52,-3634.09 -669.52,-3522 ; -625.55,1022.79 -625.55,1386.72 ; -445.34,-3522 -445.34,-3335.18 ; -297.28,-3634.09 -297.28,-2662.62 ; -295.88,-3559.36 638.23,-3559.36 ; -295.88,-3484.63 638.23,-3484.63 ; -295.88,-3409.91 638.23,-3409.91 ; -295.88,-3260.45 638.23,-3260.45 ; -295.88,-3185.72 638.23,-3185.72 ; -295.88,-3110.99 638.23,-3110.99 ; -295.88,-3036.26 638.23,-3036.26 ; -295.88,-2961.54 638.23,-2961.54 ; -295.88,-2886.81 638.23,-2886.81 ; -295.88,-2812.08 638.23,-2812.08 ; -295.88,-2737.35 638.23,-2737.35 ; -285.88,-3756.93 -285.88,-3635.61 ; -285.88,1459.51 -285.88,1580.82 ; -35.73,-3634.09 -35.73,-2662.62 ; 638.23,-3634.09 638.23,-2662.62 ; 638.23,-2837.88 1591.01,-2837.88 ; 745.28,-3756.93 745.28,-3635.61 ; 745.28,1459.51 745.28,1580.82 ; 1591.01,-3634.09 1591.01,-2662.62 ; 1591.01,-3223.09 2525.12,-3223.09 ; 1591.01,-3148.36 2525.12,-3148.36 ; 1591.01,-3073.63 2525.12,-3073.63 ; 1591.01,-2998.9 2525.12,-2998.9 ; 1591.01,-2924.17 2525.12,-2924.17 ; 1591.01,-2849.44 2525.12,-2849.44 ; 1591.01,-2756.03 2525.12,-2756.03 ; 1713.66,1531.72 1776.45,1459.42 1838.94,1531.72 ; 1776.43,-3756.93 1776.43,-3635.61 ; 1776.43,1459.51 1776.43,1580.82 ; 2058.07,-3223.09 2058.07,-2756.03 ; 2525.76,-3634.09 2525.76,-2662.62 ; 2807.59,-3756.93 2807.59,-3635.61 ; 2807.59,1459.51 2807.59,1580.82 ; 3838.75,-3756.93 3838.75,-3635.61 ; 3838.75,1459.51 3838.75,1580.82 ; 4809.25,-3756.93 4809.25,-3635.61 ; 4809.25,1459.51 4809.25,1580.82 ; 5779.75,-2373.96 5901.06,-2373.96 ; 5779.75,-1088.05 5901.06,-1088.05 ; 5779.75,52.29 5901.06,52.29 ; 5852.93,-1149.34 5787.77,-1087.99 5852.93,-1027.92 ; 1776.43,-3635.61 1715.78,-3708.4 1837.09,-3708.4 1776.43,-3635.61 ; -2348.19,-3756.93 -2348.19,1580.82 5901.06,1580.82 5901.06,-3756.93 -2348.19,-3756.93 ; -2219.29,-3635.61 -2219.29,1459.51 5787.34,1459.51 5787.34,-3635.61 -2219.29,-3635.61
  text "2" at -710.47,1486.2 h51.99
  text "1" at -1741.63,1483.77 h51.99
  text "3" at 260.03,1483.77 h51.99
  text "4" at 1351.84,1483.77 h51.99
  text "5" at 2322.34,1483.77 h51.99
  text "6" at 3353.5,1483.77 h51.99
  text "7" at 4324,1483.77 h51.99
  text "8" at 5355.15,1483.77 h51.99
  text "REVISIONS" at -1232.12,1410.99 h21.66
  text "APPROVED" at -2020.65,1338.2 h13.86
  text "DATE" at -1838.68,1338.2 h13.86
  text "DESCRIPTION" at -1122.94,1338.2 h13.86
  text "REV." at -637.69,1338.2 h13.86
  text "REV." at -555.19,1338.2 h13.86
  text "Notes:" at 5616.02,1242.01 h75
  text "1) Refer to BOM for stuffing options." at 5548.52,1118.26 h46.88
  text "2) Observe polarity on diodes and capacitors." at 5567.27,1002.01 h46.88
  text "D" at -2263.27,683.11 h51.99
  text "D" at 5864.66,683.11 h51.99
  text "C" at -2263.27,-530.01 h51.99
  text "C" at 5864.66,-530.01 h51.99
  text "B" at -2263.27,-1743.14 h51.99
  text "B" at 5864.66,-1743.14 h51.99
  text "Secondary Side" at 2282.88,-2173.49 h133.44
  text "DWN:" at 617.63,-2712.98 h21.35
  text "CONTRACT NO." at 1553.71,-2716 h21.35
  text "APPLICATION" at 2207.58,-2716 h21.35
  text "www.wstscorp.com      10/15" at 451.4,-2720.95 h26.69
  text "CHK:" at 617.63,-2787.71 h21.35
  text "TEXAS INSTRUMENTS" at -717.78,-2806.09 h66.72
  text "NEXT ASSY." at 1972.08,-2815.74 h21.35
  text "USED ON" at 2401.77,-2815.74 h21.35
  text "P.E.:" at 617.63,-2862.44 h21.35
  text "UNLESS OTHERWISE SPECIFIED" at 1551.73,-2899.81 h26.69
  text "DES.ENG.:" at 617.63,-2937.17 h21.35
  text "TITLE:" at -333.24,-2961.54 h21.35
  text "1. TOLERANCES:" at 1551.73,-3002.56 h21.35
  text "P.C.:" at 617.63,-3011.9 h21.35
  text "ASSEMBLY DRAWING," at -868.83,-3020.13 h53.38
  text "A" at -2263.27,-3029.05 h51.99
  text "A" at 5864.66,-3029.05 h51.99
  text "+" at 1215.46,-3039.92 h10.68
  text "0.26 (.010)" at 1159.41,-3058.6 h21.35
  text "-" at 1215.46,-3064.12 h10.68
  text "LINEAR =" at 1486.35,-3067.94 h21.35
  text "Q.C.:" at 617.63,-3086.63 h21.35
  text "0" at 1037.97,-3095.97 h10.68
  text "+" at 1187.43,-3105.31 h10.68
  text "0.50" at 1131.39,-3123.99 h21.35
  text "ANGULAR =" at 1486.35,-3123.99 h21.35
  text "-" at 1187.43,-3129.51 h10.68
  text "C.M.:" at 617.63,-3170.7 h21.35
  text "F28335 controlCARD R3.0" at -867.91,-3177.13 h40.03
  text "REL:" at 617.63,-3236.08 h21.35
  text "2. ALL DIMENSIONS ARE IN" at 1551.73,-3236.08 h21.35
  text "MM (INCHES)." at 1486.35,-3292.13 h21.35
  text "MATERIAL:  SEE NOTE" at 2485.84,-3292.13 h21.35
  text "MFG:" at 617.63,-3310.81 h21.35
  text "FINISH:  SEE NOTE" at 2485.84,-3357.52 h21.35
  text "REV:" at -2080.03,-3381.88 h21.35
  text "DRAWING NO." at -968.44,-3381.88 h21.35
  text "CAGE CODE NO." at -492.04,-3381.88 h21.35
  text "SIZE" at -314.56,-3381.88 h21.35
  text "ENG.MGR:" at 617.63,-3385.54 h21.35
  text "3. INTERPRET DRAWING IN" at 1551.73,-3432.25 h21.35
  text "OTHER:" at 617.63,-3460.27 h21.35
  text "F28335 controlCARD" at -1244.7,-3466.99 h46.71
  text "1.3" at -2084.32,-3474.5 h45
  text "C" at -350.47,-3485.68 h53.38
  text "ACCORDANCE WITH" at 1486.35,-3488.29 h21.35
  text "OTHER:" at 617.63,-3535 h21.35
  text "DOD-STD-100." at 1486.35,-3544.34 h21.35
  text "SHEET     OF" at -1597.43,-3591.51 h21.35
  text "SCALE:" at -323.41,-3591.51 h21.35
  text "DO NOT SCALE DRAWING" at 2385.44,-3592.55 h21.35
  text "1:1" at -529.94,-3593.96 h26.69
  text "2    2" at -1766.94,-3597.55 h26.69
  text "OTHER:" at 617.63,-3609.73 h21.35
  text "2" at -710.47,-3730.24 h51.99
  text "1" at -1741.63,-3732.66 h51.99
  text "3" at 260.03,-3732.66 h51.99
  text "4" at 1351.84,-3732.66 h51.99
  text "5" at 2322.34,-3732.66 h51.99
  text "6" at 3353.5,-3732.66 h51.99
  text "7" at 4324,-3732.66 h51.99
  text "8" at 5355.15,-3732.66 h51.99
Drill Drawing Format:
  lines w1: -7488.18,-5233.1 -7238.18,-5233.1 ; -7488.18,-2371.1 -7238.18,-2371.1 ; -7488.18,-21.1 -7238.18,-21.1 ; -7389,-2497.41 -7254.71,-2370.97 -7389,-2247.19 ; -5238.18,-7871.1 -5238.18,-7621.1 ; -5238.18,2878.9 -5238.18,3128.9 ; -3238.18,-7871.1 -3238.18,-7621.1 ; -3238.18,2878.9 -3238.18,3128.9 ; -1113.18,-7871.1 -1113.18,-7621.1 ; -1113.18,2878.9 -1113.18,3128.9 ; 882.99,3027.7 1011.79,2878.72 1141.19,3027.7 ; 1011.82,-7871.1 1011.82,-7621.1 ; 1011.82,2878.9 1011.82,3128.9 ; 2894.77,-7618.66 2894.77,-6318.66 ; 2895.62,-7068.66 4145.62,-7068.66 ; 2895.62,-6968.66 4145.62,-6968.66 ; 2895.62,-6868.66 4145.62,-6868.66 ; 2895.62,-6768.66 4145.62,-6768.66 ; 2895.62,-6668.66 4145.62,-6668.66 ; 2895.62,-6568.66 4145.62,-6568.66 ; 2895.62,-6443.66 4145.62,-6443.66 ; 2895.62,-6318.66 9245.62,-6318.66 ; 3136.82,-7871.1 3136.82,-7621.1 ; 3136.82,2878.9 3136.82,3128.9 ; 3520.62,-7068.66 3520.62,-6443.66 ; 4145.62,-7618.66 4145.62,-6318.66 ; 4145.62,-6553.18 5420.62,-6553.18 ; 5261.82,-7871.1 5261.82,-7621.1 ; 5261.82,2878.9 5261.82,3128.9 ; 5420.62,-7618.66 5420.62,-6318.66 ; 5420.62,-7518.66 6670.62,-7518.66 ; 5420.62,-7418.66 6670.62,-7418.66 ; 5420.62,-7318.66 6670.62,-7318.66 ; 5420.62,-7218.66 6670.62,-7218.66 9245.62,-7218.66 ; 5420.62,-7118.66 6670.62,-7118.66 ; 5420.62,-7018.66 6670.62,-7018.66 ; 5420.62,-6918.66 6670.62,-6918.66 ; 5420.62,-6818.66 6670.62,-6818.66 ; 5420.62,-6718.66 6670.62,-6718.66 ; 5420.62,-6618.66 6670.62,-6618.66 ; 5420.62,-6518.66 6670.62,-6518.66 ; 5420.62,-6418.66 6670.62,-6418.66 ; 5761.82,2128.9 9261.82,2128.9 ; 5761.82,2278.9 9261.82,2278.9 ; 5761.82,2428.9 9261.82,2428.9 ; 5761.82,2578.9 9261.82,2578.9 ; 5761.82,2728.9 9261.82,2728.9 ; 5761.82,2878.9 5761.82,1978.9 9261.82,1978.9 ; 5961.82,1978.9 5961.82,2728.9 ; 6161.82,1978.9 6161.82,2728.9 ; 6322.49,-7618.66 6322.49,-6318.66 ; 6670.62,-6643.66 9245.62,-6643.66 ; 6672.01,-7467.34 9239.97,-7467.34 ; 6672.49,-7618.66 6672.49,-6318.66 ; 6870.62,-7468.66 6870.62,-7218.66 ; 7170.62,-7618.66 7170.62,-7468.66 ; 7261.82,-7871.1 7261.82,-7621.1 ; 7261.82,2878.9 7261.82,3128.9 ; 7520.62,-7468.66 7520.62,-7218.66 ; 8361.82,1978.9 8361.82,2728.9 ; 8370.62,-7618.66 8370.62,-7468.66 ; 8761.82,1978.9 8761.82,2728.9 ; 9020.62,-7468.66 9020.62,-7218.66 ; 9261.82,-2371.1 9511.82,-2371.1 ; 9261.82,-21.1 9511.82,-21.1 ; 9279.82,-5005.1 9529.82,-5005.1 ; 9410.13,-2496.08 9241.05,-2372.3 9410.13,-2248.08 ; 9411.82,-2496.1 9411.82,-2246.1 ; 1011.82,-7621.1 1136.82,-7771.1 886.82,-7771.1 1011.82,-7621.1 ; -7488.18,-7871.1 -7488.18,3128.9 9511.82,3128.9 9511.82,-7871.1 -7488.18,-7871.1 ; -7253.83,-7621.1 -7253.83,2878.9 9246.17,2878.9 9246.17,-7621.1 -7253.83,-7621.1
  text "2" at 6156.82,2933.9 h107.14
  text "8" at -6343.18,2928.9 h107.14
  text "7" at -4218.18,2928.9 h107.14
  text "6" at -2218.18,2928.9 h107.14
  text "5" at -93.18,2928.9 h107.14
  text "4" at 1906.82,2928.9 h107.14
  text "3" at 4156.82,2928.9 h107.14
  text "1" at 8281.82,2928.9 h107.14
  text "REVISIONS" at 7231.82,2778.9 h44.64
  text "REV." at 5836.82,2628.9 h28.57
  text "REV." at 6006.82,2628.9 h28.57
  text "DESCRIPTION" at 7006.82,2628.9 h28.57
  text "DATE" at 8481.82,2628.9 h28.57
  text "APPROVED" at 8856.82,2628.9 h28.57
  text "D" at -7393.18,1278.9 h107.14
  text "D" at 9356.82,1278.9 h107.14
  text "C" at -7393.18,-1221.1 h107.14
  text "C" at 9356.82,-1221.1 h107.14
  text "B" at -7393.18,-3721.1 h107.14
  text "B" at 9356.82,-3721.1 h107.14
  text "A" at 9356.82,-6371.1 h107.14
  text "DWN:" at 5468.18,-6386.05 h28.57
  text "APPLICATION" at 3340.54,-6390.09 h28.57
  text "CONTRACT NO." at 4215.54,-6390.09 h28.57
  text "wstscorp.com      10/15" at 5793.18,-6399.12 h35.72
  text "CHK:" at 5468.18,-6486.05 h28.57
  text "TEXAS INSTRUMENTS" at 7262.61,-6522.12 h89.28
  text "USED ON" at 3080.68,-6523.55 h28.57
  text "NEXT ASSY." at 3655.68,-6523.55 h28.57
  text "A" at -7393.18,-6583.1 h107.14
  text "P.E.:" at 5468.18,-6586.05 h28.57
  text "UNLESS OTHERWISE SPECIFIED" at 4218.18,-6636.05 h35.71
  text "DES.ENG.:" at 5468.18,-6686.05 h28.57
  text "TITLE:" at 6740.62,-6718.66 h28.57
  text "1. TOLERANCES:" at 4218.18,-6773.55 h28.57
  text "P.C.:" at 5468.18,-6786.05 h28.57
  text "+" at 4668.18,-6823.56 h14.29
  text "0.26 (.010)" at 4743.18,-6848.55 h28.57
  text "-" at 4668.18,-6855.94 h14.29
  text "LINEAR =" at 4305.68,-6861.05 h28.57
  text "Q.C.:" at 5468.18,-6886.05 h28.57
  text "FABRICATION DRAWING," at 7410.52,-6889.11 h71.43
  text "0" at 4905.68,-6898.55 h14.29
  text "+" at 4705.68,-6911.05 h14.29
  text "ANGULAR =" at 4305.68,-6936.05 h28.57
  text "0.50" at 4780.68,-6936.05 h28.57
  text "-" at 4705.68,-6943.44 h14.29
  text "C.M.:" at 5468.18,-6998.55 h28.57
  text "F28335 controlCARD" at 7541.53,-7023.38 h53.57
  text "2. ALL DIMENSIONS ARE IN" at 4218.18,-7086.05 h28.57
  text "REL:" at 5468.18,-7086.05 h28.57
  text "MATERIAL:  SEE NOTE" at 2968.18,-7161.05 h28.57
  text "MM (INCHES)." at 4305.68,-7161.06 h28.57
  text "MFG:" at 5468.18,-7186.05 h28.57
  text "FINISH:  SEE NOTE" at 2968.18,-7248.55 h28.57
  text "SIZE" at 6715.62,-7281.16 h28.57
  text "CAGE CODE NO." at 6953.12,-7281.16 h28.57
  text "DRAWING NO." at 7590.62,-7281.16 h28.57
  text "REV:" at 9078.12,-7281.16 h28.57
  text "ENG.MGR:" at 5468.18,-7286.05 h28.57
  text "3. INTERPRET DRAWING IN" at 4218.18,-7348.55 h28.57
  text "F2837x controlCARD" at 7994.99,-7381.55 h62.5
  text "1.3" at 9078.08,-7385.49 h60
  text "OTHER:" at 5468.18,-7386.05 h28.57
  text "B" at 6763.67,-7420.06 h71.43
  text "ACCORDANCE WITH" at 4305.68,-7423.55 h28.57
  text "OTHER:" at 5468.18,-7486.05 h28.57
  text "DOD-STD-100." at 4305.68,-7498.55 h28.57
  text "SCALE:" at 6727.46,-7561.68 h28.57
  text "SHEET     OF" at 8432.33,-7561.68 h28.57
  text "DO NOT SCALE DRAWING" at 3102.54,-7563.07 h28.57
  text "1:1" at 7003.83,-7564.96 h35.71
  text "1    1" at 8666.17,-7571.1 h35.71
  text "OTHER:" at 5468.18,-7586.05 h28.57
  text "2" at 6156.82,-7816.1 h107.14
  text "8" at -6343.18,-7821.1 h107.14
  text "7" at -4218.18,-7821.1 h107.14
  text "6" at -2218.18,-7821.1 h107.14
  text "5" at -93.18,-7821.1 h107.14
  text "4" at 1906.82,-7821.1 h107.14
  text "3" at 4156.82,-7821.1 h107.14
  text "1" at 8281.82,-7821.1 h107.14
Drafting Layer 1:
  lines w10: -386.42,-1470.1 3445,-1470.1 ; 997.67,-2022.1 997.67,-1362.1 ; 1061.06,-2126.1 1061.06,-1226.1 ; 2521.06,-1826.1 2521.06,-36.1
Drafting Layer 2:
  circle w10: c-108.44,-1360.1 r39
  circle w10: c2230.56,-1360.1 r39
  lines w10: -341.94,-1562.1 3375,-1562.1 ; -303.94,-1666.1 3370,-1666.1
Film Outline:
  lines w8: 1235.17,-6375.1 1235.17,-4425.1 8435.17,-4425.1 ; 1235.17,-6375.1 8435.17,-6375.1 ; 1235.17,-6375.1 1235.17,-6075.1 2835.17,-6075.1 ; 1235.17,-6375.1 2835.17,-6375.1 ; 2835.17,-6375.1 2835.17,-6075.1 ; 2835.17,-6375.1 4085.17,-6375.1 ; 2835.17,-6375.1 2835.17,-6075.1 ; 2835.17,-6075.1 4085.17,-6075.1 ; 4085.17,-6375.1 4085.17,-6075.1 ; 4085.17,-6375.1 4085.17,-6075.1 ; 4085.17,-6375.1 5685.17,-6375.1 5685.17,-6075.1 4085.17,-6075.1 ; 4085.17,-6375.1 4085.17,-4975.1 ; 4085.17,-6375.1 8435.17,-6375.1 ; 4085.17,-6375.1 4085.17,-6075.1 ; 4085.17,-6375.1 8435.17,-6375.1 ; 4085.17,-6075.1 8435.17,-6075.1 ; 4085.17,-4975.1 8435.17,-4975.1 ; 4085.17,-4975.1 4085.17,-5675.1 8435.17,-5675.1 ; 4085.17,-4975.1 8435.17,-4975.1 ; 4085.17,-4975.1 4085.17,-4425.1 8435.17,-4425.1 ; 4085.17,-4975.1 8435.17,-4975.1 ; 8435.17,-6375.1 8435.17,-4425.1 ; 8435.17,-6375.1 8435.17,-4975.1 ; 8435.17,-6375.1 8435.17,5119.9 -4348.83,5119.9 -4348.83,-6375.1 8435.17,-6375.1 ; 8435.17,-6375.1 8435.17,-6075.1 ; 8435.17,-6075.1 8435.17,-5675.1 ; 8435.17,-6075.1 7085.17,-6075.1 7085.17,-5675.1 8435.17,-5675.1 ; 8435.17,-5675.1 8435.17,-4975.1 ; 8435.17,-4975.1 8435.17,-4425.1
  text "Artwork Designed By:" at 1305.17,-4555.1 h75
  text "Artwork Designed For:" at 4155.17,-4555.1 h75
  text "TEXAS INSTRUMENTS" at 5599.13,-4810.09 h100
  text "Willow Spring Technical Services Corp." at 1520.17,-4883.1 h75
  text "Board Description:" at 4155.17,-5105.1 h75
  text "1185 Centre Street" at 2185.75,-5116.61 h75
  text "F28335 controlCARD" at 5601.75,-5310.09 h100
  text "Middleboro, MA 02346" at 2085.75,-5341.61 h75
  text "www.wstscorp.com" at 2892.17,-5579.1 h75
  text "PH 508-947-2709" at 1435.75,-5591.61 h75
  text "Part No:" at 4155.17,-5805.1 h75
  text "Revision:" at 7155.17,-5805.1 h75
  text "1.3" at 7959.93,-5931.97 h100
  text "F2837x controlCARD" at 5105.17,-5955.1 h100
  text "Job No:" at 1305.17,-6205.1 h75
  text "Date:" at 2905.17,-6205.1 h75
  text "LAYER" at 4549.49,-6247.49 h75
  text "TEX.137" at 2046.89,-6260.09 h100
  text "10/05/15" at 3336.67,-6267.23 h100
Primary Solder Mask:
  region: 1041.6,-1698.5 2083.28,-1698.5 2083.28,-1561 1041.6,-1561 1041.6,-1698.5
  region: 36.6,-1698.5 941.1,-1698.5 941.1,-1555 36.6,-1555 36.6,-1698.5
  region: 2840.6,-1696.5 3842,-1696.5 3842,-1559 2840.6,-1559 2840.6,-1696.5
  lines w25: -132.44,-1392.1 -148.44,-1392.1 -148.44,-1470.1 28.56,-1470.1 28.56,-1706.1 950.67,-1706.1 950.67,-1509.1 cw(c997.67,-1509.1) 1044.67,-1509.1 1044.67,-1706.1 2093.56,-1706.1 2093.56,-1470.1 2270.56,-1470.1 2270.56,-1391.1 2254.56,-1391.1 ; -132.42,-1392.12 ccw(c-108.89,-1361.01) -69.94,-1359.11 -70.44,-1359.1 -70.44,-1226.1 -263.94,-1226.1 -263.93,305.19 3902.56,305.19 3902.56,-1470 3837.15,-1470 3837.15,-1702.1 ; -131.69,-1392.1 -147.69,-1392.1 -147.69,-1470.1 29.31,-1470.1 29.31,-1706.1 951.42,-1706.1 951.42,-1509.1 cw(c998.42,-1509.1) 1045.42,-1509.1 1045.42,-1706.1 2094.31,-1706.1 2094.31,-1470.1 2271.31,-1470.1 2271.31,-1391.1 2255.31,-1391.1 ; -131.67,-1392.12 ccw(c-108.14,-1361.01) -69.19,-1359.11 -69.69,-1359.1 -69.69,-1226.1 -260.66,-1226.1 -260.67,305 3902.56,305 3902.56,-1470.1 3837.15,-1470.1 3837.15,-1702.1 ; 2254.59,-1391.08 cw(c2231.06,-1359.98) 2192.06,-1360.11 2191.56,-1360.1 2191.56,-1226.1 2841.87,-1226.1 ; 2255.34,-1391.08 cw(c2231.81,-1359.98) 2192.81,-1360.11 2192.31,-1360.1 2192.31,-1226.1 2841.87,-1226.1 ; 2841.87,-1702.1 3837.15,-1702.1 ; 2841.87,-1702.1 2841.87,-1226.1 ; 2841.87,-1702.1 3837.15,-1702.1 ; 2841.87,-1702.1 2841.87,-1226.1
  text "Primary Side Soldermask" at 6172.82,-6261.77 h75
Secondary Solder Mask:
  region: 1036.6,-1698.5 2080,-1698.5 2080,-1561 1036.6,-1561 1036.6,-1698.5
  region: 2840.6,-1696.5 3842,-1696.5 3842,-1559 2840.6,-1559 2840.6,-1696.5
  region: 30,-1695 934.5,-1695 934.5,-1554 30,-1554 30,-1695
  lines w25: -132.44,-1392.1 -148.44,-1392.1 -148.44,-1470.1 28.56,-1470.1 28.56,-1706.1 950.67,-1706.1 950.67,-1509.1 cw(c997.67,-1509.1) 1044.67,-1509.1 1044.67,-1706.1 2093.56,-1706.1 2093.56,-1470.1 2270.56,-1470.1 2270.56,-1391.1 2254.56,-1391.1 ; -132.42,-1392.12 ccw(c-108.89,-1361.01) -69.94,-1359.11 -70.44,-1359.1 -70.44,-1226.1 -263.94,-1226.1 -263.93,305.19 3902.56,305.19 3902.56,-1470 3837.15,-1470 3837.15,-1702.1 2841.87,-1702.1 2841.87,-1226.1 2191.56,-1226.1 2191.56,-1360.1 2192.06,-1360.1 ccw(c2231.06,-1359.98) 2254.59,-1391.08
  text "Secondary Side Soldermask" at 6104.08,-6261.77 h75
Primary Solder Stencil:
  text "Primary Side Solder Stencil" at 6117.83,-6261.77 h75
Secondary Solder Stencil:
  text "Secondary Side Solder Stencil" at 6049.09,-6261.77 h75